# Altium PCB PCB_doublesided.PcbDoc
Units mil, origin at the board's own origin, x right, y up, seen from the top; angles counter-clockwise.
Board outline 1215.03 x 2170.03 mil, 2 copper layers (Top Layer, Bottom Layer); 9 components, 6 nets, 51 pads, 0 vias.
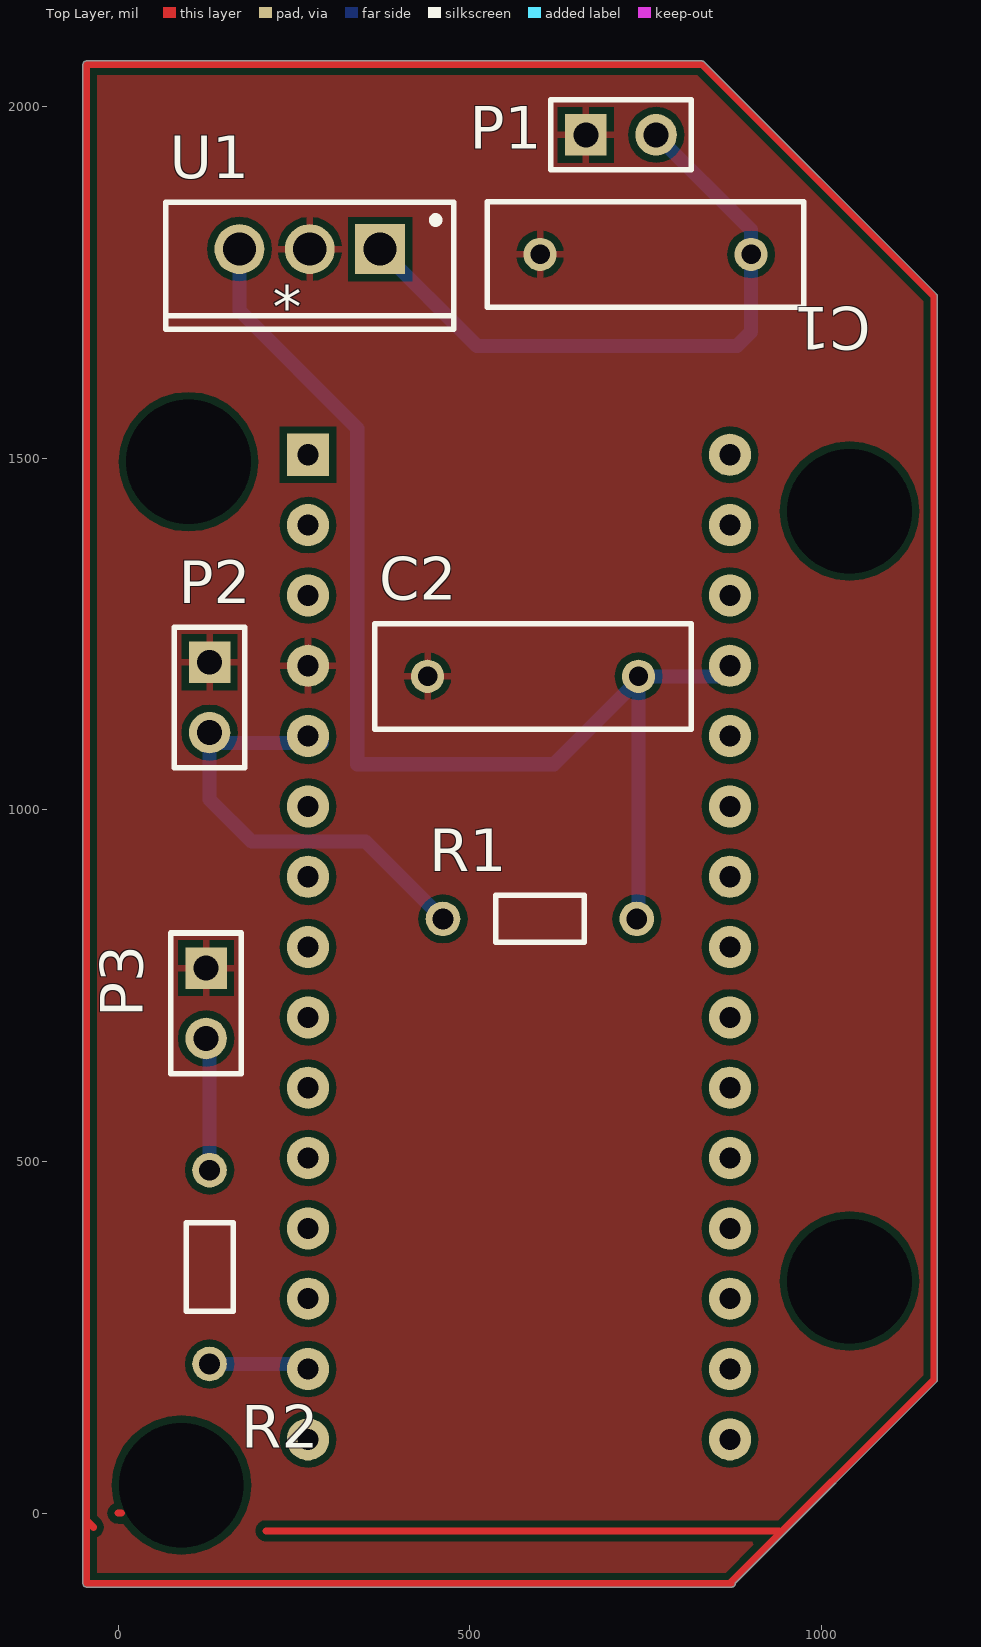
[diagram p0: Top Layer view]
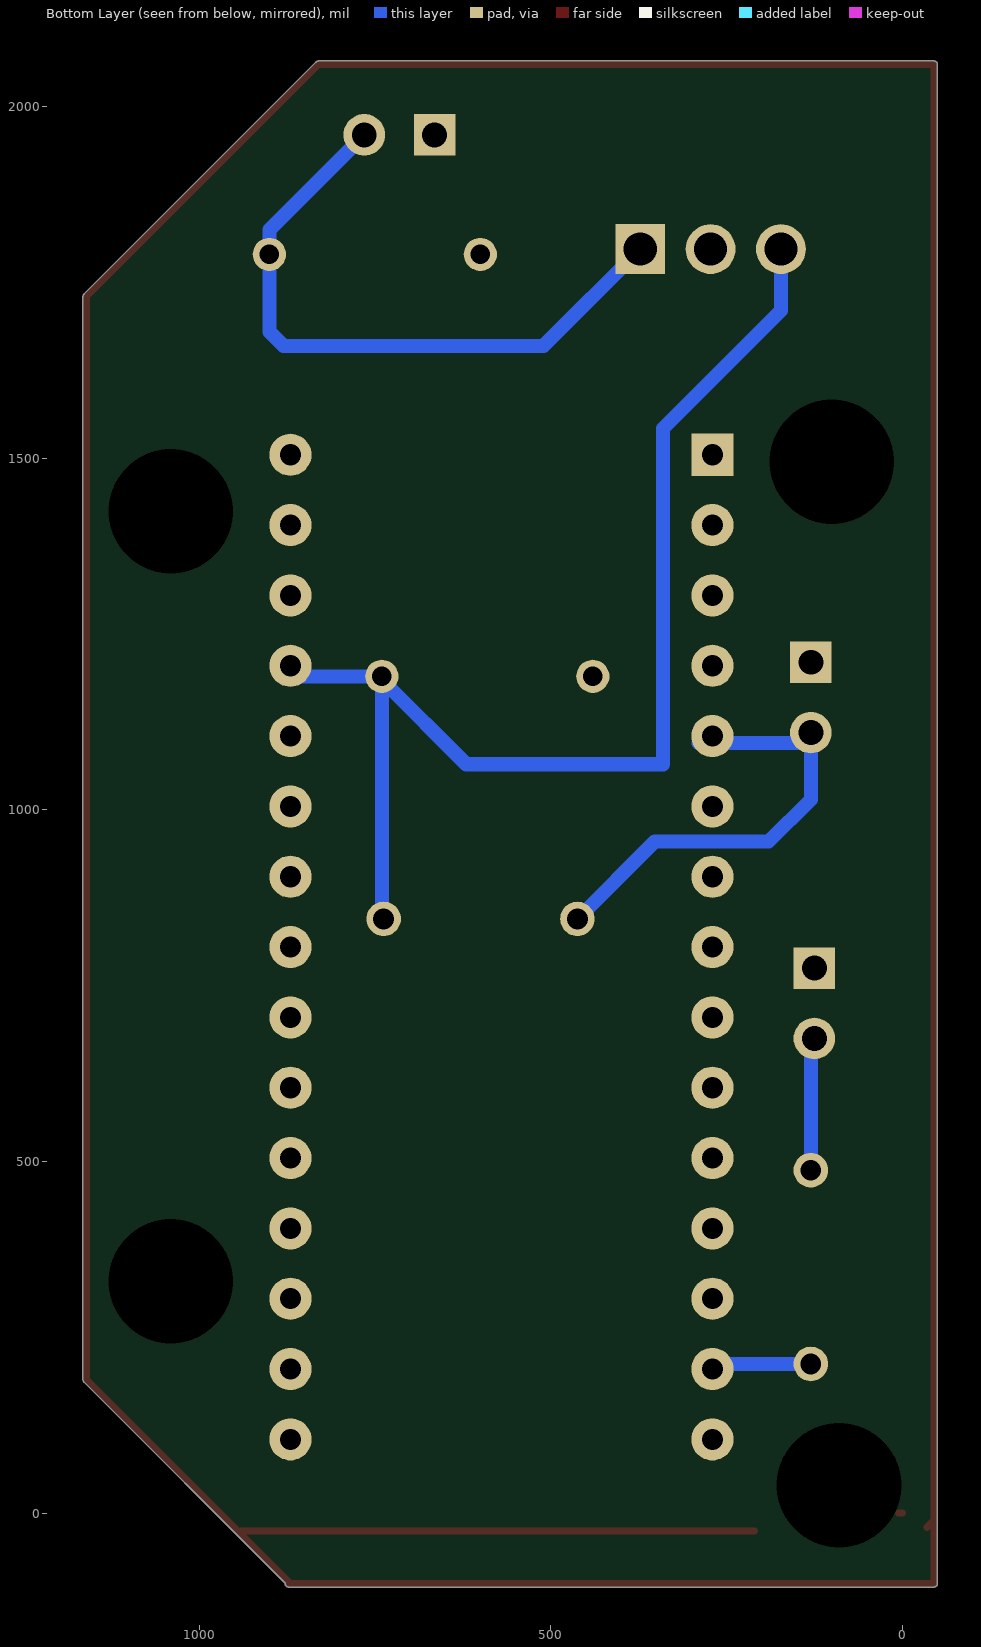
[diagram p1: Bottom Layer view, seen from below]

## Layer stack, top to bottom
Top Solder: solder mask 0.4, Solder Resist, Dk 3.5
Top Layer: signal copper 1.4
Dielectric 1: dielectric 12.6, FR-4, Dk 4.8
Bottom Layer: signal copper 1.4
Bottom Solder: solder mask 0.4, Solder Resist, Dk 3.5

## Board outline
-50.02,-100 -50.02,2060 cw(c-45,2060) -45,2065.01 830,2065.01 cw(c830,2060) 833.56,2063.53 833.55,2063.55 1163.55,1733.55 1163.53,1733.56 cw(c1160,1730) 1165.02,1730 1165.01,190 cw(c1160,190) 1163.53,186.44 1163.55,186.45 877.5,-99.59 cw(c872.5,-100) 877.52,-100 cw(c872.5,-100) 872.5,-105.02 -45,-105.02 cw(c-45,-100)

## Design rules (kind name [scope] priority, off if disabled: settings)
Clearance Clearance_2 [InNamedPolygon('Top Layer-GND')] p1: gap=10 ignorepadtopadclearanceinfootprint=FALSE except(0: Arc-Hole Track-Hole SMDPad-Hole THPad-Hole Via-Hole Fill-Hole Poly-Hole Region-Hole Text-Hole)
Clearance Clearance_1 [InNamedPolygon('Top Layer-GND')] p2: gap=10 ignorepadtopadclearanceinfootprint=FALSE except(0: Arc-Hole Track-Hole SMDPad-Hole THPad-Hole Via-Hole Fill-Hole Poly-Hole Region-Hole Text-Hole)
Clearance [All] p3: gap=10 ignorepadtopadclearanceinfootprint=FALSE except(0: Arc-Hole Track-Hole SMDPad-Hole THPad-Hole Via-Hole Fill-Hole Poly-Hole Region-Hole Text-Hole)
PolygonConnect [All] p1: connectstyle=Relief reliefconductorwidth=10 reliefentries=4 polygonreliefangle="90 Angle" airgapwidth=10
RoomDefinition Rebecca_Schematic [InComponentClass('Rebecca_Schematic')] p1: confinementstyle=ConfineIn formatcopy=TRUE lockcomponents=FALSE outline 1980,-680 4200,-680 4200,1115 1980,1115
RoutingVias [All] p1: holewidth=28 width=50 viastyle="Through Hole" minholewidth=28 minwidth=50 maxholewidth=28 maxwidth=50
SolderMaskExpansion [All] p1: expansion=4
Width [All] p1: maxlimit=40 minlimit=10 preferedwidth=20 minimp=50.000000 maximp=50.000000 favimp=50.000000
30 further rules are at their usual default settings.

## Classes and differential pairs
component class Rebecca_Schematic: C1 C2 P1 P2 P3 R1 R2

## Components (designator, comment, footprint, x,y, rotation, side; value= is the part's Value field where it differs from the comment)
* "arduinoNano" "Arduino nano" 210,1665 r270 top
C1 "Cap" RAD-0.3 750,1790 r180 top value=100pF
C2 "Cap" RAD-0.3 590,1190 r0 top value=100pF
P1 "9V Battery" HDR1X2 665,1960 r0 top
P2 "Button" HDR1X2 130,1210 r270 top
P3 "LED" HDR1X2 125.03,775 r270 top
R1 "15 K" YFDZ-MFJRY13-2_M 599.7,845 r0 top
R2 "220" YFDZ-MFJRY13-2_M 130,350 r270 top
U1 "L7805ABP" TO220FP 272.5,1797.5 r180 top

## Footprints (in the part's own frame and the unit in brackets; to place one, negate y for a bottom-side part, rotate by r counter-clockwise, add the part's x,y. Pads: shape width x height; smd on the part's side, far side on the other; paste and mask are expansions set on the pad)
"Arduino nano" [mil] "arduino nano"
  rect 60x60 hole 30: 0(160,60)
  round 60 hole 30: 1(260,60) 2(360,60) 3(460,60) 4(560,60) 5(660,60) 6(760,60) 7(860,60) 8(960,60) 9(1060,60) 10(1160,60) 11(1260,60) 12(1360,60) 13(1460,60) 14(1560,60) 15(1560,660) 16(1460,660) 17(1360,660) 18(1260,660) 19(1160,660) 20(1060,660) 21(960,660) 22(860,660) 23(760,660) 24(660,660) 25(560,660) 26(460,660) 27(360,660) 28(260,660) 29(160,660)
HDR1X2 [mm] "Connector; Header; 2 Position"
  rect 1.5x1.5 hole 0.9: 1(0,0)
  round 1.5 hole 0.9: 2(2.54,0)
  silkscreen extent -1.27,-1.27 3.81,1.27
RAD-0.3 [mm] "Radial Cap, Thru-Hole; 2 Leads; 0.3 in Pin Spacing"
  round 1.2 hole 0.7: 1(-3.81,0) 2(3.81,0)
  silkscreen extent -5.71,-1.91 5.71,1.91
TO220FP [mm] "TO, Thru-Hole, Vertical, Heatsink Mounted; 3 In-Line Leads; Pitch 2.54 mm"
  rect 1.8x1.8 hole 1.2: 1(-2.54,0)
  round 1.8 hole 1.2: 2(0,0) 3(2.54,0)
  silkscreen extent -5.2,-1.7 5.2,2.9, body extent -5.25,-1.75 5.25,2.95, height 20
YFDZ-MFJRY13-2_M [mm] "Through Hole Resistor, 2-Leads, Dia 1.7mm, Body Length 3.2mm, Pin Spacing 7mm, IPC Low Density"
  round 1.25 hole 0.75: 1(-3.5,0) 2(3.5,0)
  silkscreen extent -1.6,-0.85 1.6,0.85, body extent -3.7,-0.85 3.71,0.85, height 1.69

## Part data
C1 C2: "Capacitor", LatestRevisionDate=17-Jul-2002, LatestRevisionNote="Re-released for DXP Platform.", PackageDescription="Radial Cap, Thru-Hole; 2 Leads; 0.3 in Pin Spacing", PackageReference=RAD-0.3, Published=8-Jun-2000, Publisher="Altium Limited"
P1 P2 P3: library part "Header 2", "Header, 2-Pin", LatestRevisionDate=17-Jul-2002, LatestRevisionNote="Re-released for DXP Platform.", Publisher="Altium Limited"
R1 R2: library part CMP-0923-00002-1, "Metal Film Fixed Resistor, 51 KOhm +/- 5%, -55 to 155 degC, 2-Pin THD, Dia 1.7 mm, Body Length 3.2 mm, RoHS", Insulation Voltage (Max.) (V)=200, Load Voltage (Max.) (V)=300, Manufacturer="YingFa Electronics", Operating Voltage (Max.) (V)=150, PartNumber=MFJRY13T52051K00, Resistance (Ohm)=51000, Temperature Range="-55 to 155 degC", Accuracy="+/- 5%", ComponentLink1Description="Manufacturer URL", ComponentLink1URL=http://www.szyfdz.net/, ComponentLink2Description=Datasheet, ComponentLink2URL=http://www.szyfdz.net/mojinshuyanghuamodianzu/, Mounting Technology="Through Hole", PackageDescription="2-Pin Through Hole Resistor, Dia 1.7 mm, Body Length 3.2 mm", PackageReference=MFJRY13-2, Pulsed Voltage (Max.) (V)=300, RoHS=TRUE
U1: library part CMP-0244-00479-1, "Positive Voltage Regulator, 5V, 3-Pin TO-220FP", ComponentLink1Description="Manufacturer URL", ComponentLink1URL=http://www.st.com, ComponentLink2Description=Datasheet, ComponentLink2URL=http://www.st.com/internet/com/TECHNICAL_RESOURCES/TECHNICAL_LITERATURE/DATASHEET/CD00000444.pdf, DatasheetVersion=16/11/2011, PackageDescription="TO, Thru-Hole, Vertical, Heatsink Mounted; 3 In-Line Leads; Pitch 2.54 mm", PackageReference=TO220FP, PackageVersion=2011

## Free pads (board coordinates)
  round 60 hole 177.17: 2(90,40) 2(1040,330) 3(1040,1425) 5(100,1495)

## Nets (pads, with @x,y where several pads share a name; then routed paths per layer and width w, separated by ;. In a path a pad name is that pad's centre, name@x,y a point inside that pad or via, vN(x,y) a via of type N, cw(c..) or ccw(c..) an arc to the next point about the centre after c; other vN are vias at no path point)
GND: *.3 C1.2 C2.1 P1.1 P2.1 P3.1 U1.2
Net*_4: *.4 P2.2 R1.1 | length 642.3
  Bottom Layer w20: P2.2 130,1015 190,955 351.91,955 R1.1 ; P2.2@145,1095 *.4@290,1095
Net*_13: *.13 R2.2 | length 143
  Bottom Layer w20: R2.2 262.8,212.2 *.13
Net*_26: *.26 C2.2 R1.2 U1.3 | length 1714.1
  Bottom Layer w20: U1.3 172.5,1710 340,1542.5 340,1065 620,1065 C2.2@737.5,1182.5 ; R1.2 740,847.5 C2.2 *.26@860,1190
NetC1_1: C1.1 P1.2 U1.1 | length 931.2
  Bottom Layer w20: U1.1@372.5,1800 U1.1 510,1660 880,1660 900,1680 C1.1 900,1825 P1.2
NetP3_2: P3.2 R2.1 | length 189.3
  Bottom Layer w20: P3.2 130,670.03 R2.1
pads on no net: *.0 *.1 *.2 *.5 *.6 *.7 *.8 *.9 *.10 *.11 *.12 *.14 *.15 *.16 *.17 *.18 *.19 *.20 *.21 *.22 *.23 *.24 *.25 *.27 *.28 *.29
copper on no net: | length 7119.9
  Top Layer w10: -45,-10 -35,-20 ; 210,-25 940,-25 ; 872.5,-100 -45,-100 -45,2060 830,2060 1160,1730 1160,190 872.5,-97.5 ; 0,0 5,0 0,0

## Polygon pours and split planes (outlines as drawn)
GND on Top Layer "Top Layer-GND" (solid, pour order 3): -50.02,-100 -50.02,2060 cw(c-45,2060) -45,2065.01 830,2065.01 cw(c830,2060) 833.56,2063.53 833.55,2063.55 1163.55,1733.55 1163.53,1733.56 cw(c1160,1730) 1165.02,1730 1165.01,190 cw(c1160,190) 1163.53,186.44 1163.55,186.45 877.5,-99.59 cw(c872.5,-100) 877.52,-100 cw(c872.5,-100) 872.5,-105.02 -45,-105.02 cw(c-45,-100)